# EAGLE board Feather (EAGLE 9.0.1)

Size 101.6 x 76.2 mm. Coordinates in mm from the lower left corner, seen from the top.
Copper layers (1*16): Top 0.035mm / dielectric 1.5mm / Bottom 0.035mm
Design rules "default": minimum track width 6mil, minimum drill 0.35mm, track to track 6mil, track to pad 6mil, pad to pad 6mil, via to via 6mil, smd to smd 6mil, copper to edge 40mil, drill to drill 6mil, minimum pad ring 10mil, minimum via ring 8mil, stop-mask expansion 4mil, vias tented up to drill 0mil, thermal gap 10mil

## Footprints (pad centres in the part's own frame; a part is rotated, then mirrored left to right if it is on the bottom)
FEATHER_FAB = drill 0.3 pad 1: P$1 3.5,3.5; P$2 98.1,72.7 | smd 1.016 x 2.032 bottom: P$3 41.91,49.93; P$4 44.45,49.93; P$5 46.99,49.93; P$6 49.53,49.93; P$7 52.07,49.93; P$8 54.61,49.93; P$9 57.15,49.93; P$10 59.69,49.93; P$11 62.23,49.93; P$12 64.77,49.93; P$13 67.31,49.93; P$14 69.85,49.93; P$15 31.75,26.289; P$16 34.29,26.289; P$17 36.83,26.289; P$18 39.37,26.289; P$19 41.91,26.289; P$20 44.45,26.289; P$21 46.99,26.289; P$22 49.53,26.289; P$23 52.07,26.289; P$24 54.61,26.289; P$25 57.15,26.289; P$26 59.69,26.289; P$27 62.23,26.289; P$28 64.77,26.289; P$29 67.31,26.289; P$30 69.85,26.289; P$36 41.91,49.93; P$60 44.45,49.93; P$61 46.99,49.93; P$62 49.53,49.93; P$63 52.07,49.93; P$64 54.61,49.93; P$65 57.15,49.93; P$66 59.69,49.93; P$67 62.23,49.93; P$68 64.77,49.93; P$69 67.31,49.93; P$70 69.85,49.93; P$71 31.75,26.289; P$72 34.29,26.289; P$73 36.83,26.289; P$74 39.37,26.289; P$75 41.91,26.289; P$76 44.45,26.289; P$77 46.99,26.289; P$78 49.53,26.289; P$79 52.07,26.289; P$80 54.61,26.289; P$81 57.15,26.289; P$82 59.69,26.289; P$83 62.23,26.289; P$84 64.77,26.289; P$85 67.31,26.289; P$86 69.85,26.289; P$87 41.91,49.93; P$88 44.45,49.93; P$89 46.99,49.93; P$90 49.53,49.93; P$91 52.07,49.93; P$92 54.61,49.93; P$93 57.15,49.93; P$94 59.69,49.93; P$95 62.23,49.93; P$96 64.77,49.93; P$97 67.31,49.93; P$98 69.85,49.93; P$99 31.75,26.289; P$100 34.29,26.289; P$101 36.83,26.289; P$102 39.37,26.289; P$103 41.91,26.289; P$104 44.45,26.289; P$105 46.99,26.289; P$106 49.53,26.289; P$107 52.07,26.289; P$108 54.61,26.289; P$109 57.15,26.289; P$110 59.69,26.289; P$111 62.23,26.289; P$112 64.77,26.289; P$113 67.31,26.289; P$114 69.85,26.289 | drill 1 pad 1.676: P$31 41.91,48.26; P$32 44.45,48.26; P$33 46.99,48.26; P$34 49.53,48.26; P$35 52.07,48.26; P$37 54.61,48.26; P$38 57.15,48.26; P$39 59.69,48.26; P$40 62.23,48.26; P$41 64.77,48.26; P$42 67.31,48.26; P$43 69.85,48.26; P$44 31.75,27.94; P$45 34.29,27.94; P$46 36.83,27.94; P$47 39.37,27.94; P$48 41.91,27.94; P$49 44.45,27.94; P$50 46.99,27.94; P$51 49.53,27.94; P$52 52.07,27.94; P$53 54.61,27.94; P$54 57.15,27.94; P$55 59.69,27.94; P$56 62.23,27.94; P$57 64.77,27.94; P$58 67.31,27.94; P$59 69.85,27.94 | smd 1.016 x 2.032: P$115 41.91,49.93; P$116 44.45,49.93; P$117 46.99,49.93; P$118 49.53,49.93; P$119 52.07,49.93; P$120 54.61,49.93; P$121 57.15,49.93; P$122 59.69,49.93; P$123 62.23,49.93; P$124 64.77,49.93; P$125 67.31,49.93; P$126 69.85,49.93; P$127 31.75,26.289; P$128 34.29,26.289; P$129 36.83,26.289; P$130 39.37,26.289; P$131 41.91,26.289; P$132 44.45,26.289; P$133 46.99,26.289; P$134 49.53,26.289; P$135 52.07,26.289; P$136 54.61,26.289; P$137 57.15,26.289; P$138 59.69,26.289; P$139 62.23,26.289; P$140 64.77,26.289; P$141 67.31,26.289; P$142 69.85,26.289

## Placement (x,y rotation side)
E$1  [FEATHER_FAB]  0,0 0 top

## Library data of the parts
E$1 = voltera_community_lib